# EAGLE board ArduinoMegaShield2 (EAGLE 8.3.2)
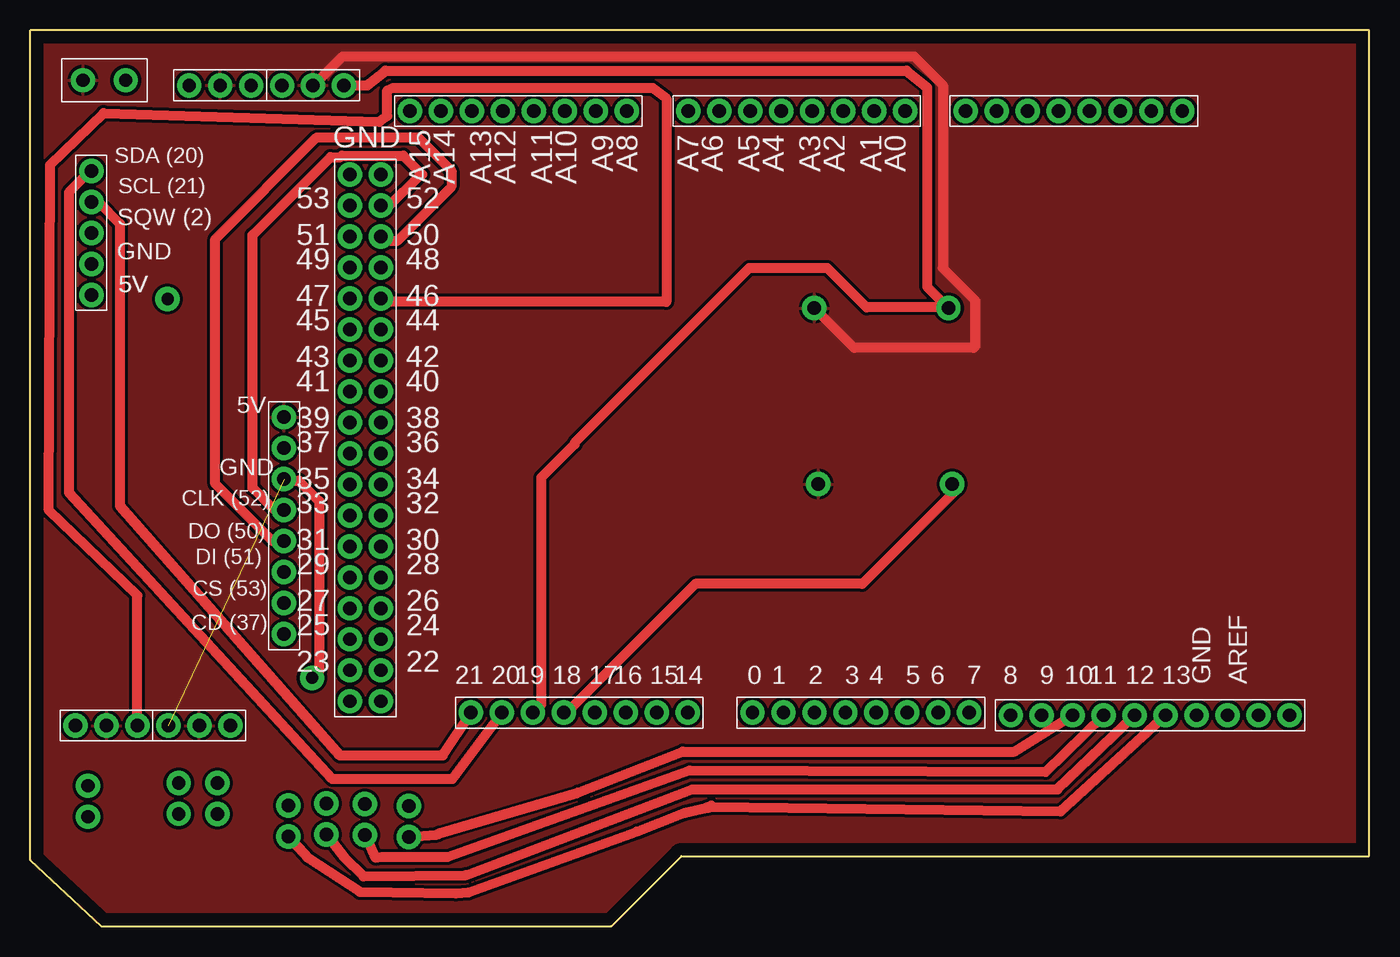
[diagram p0: board, top side]
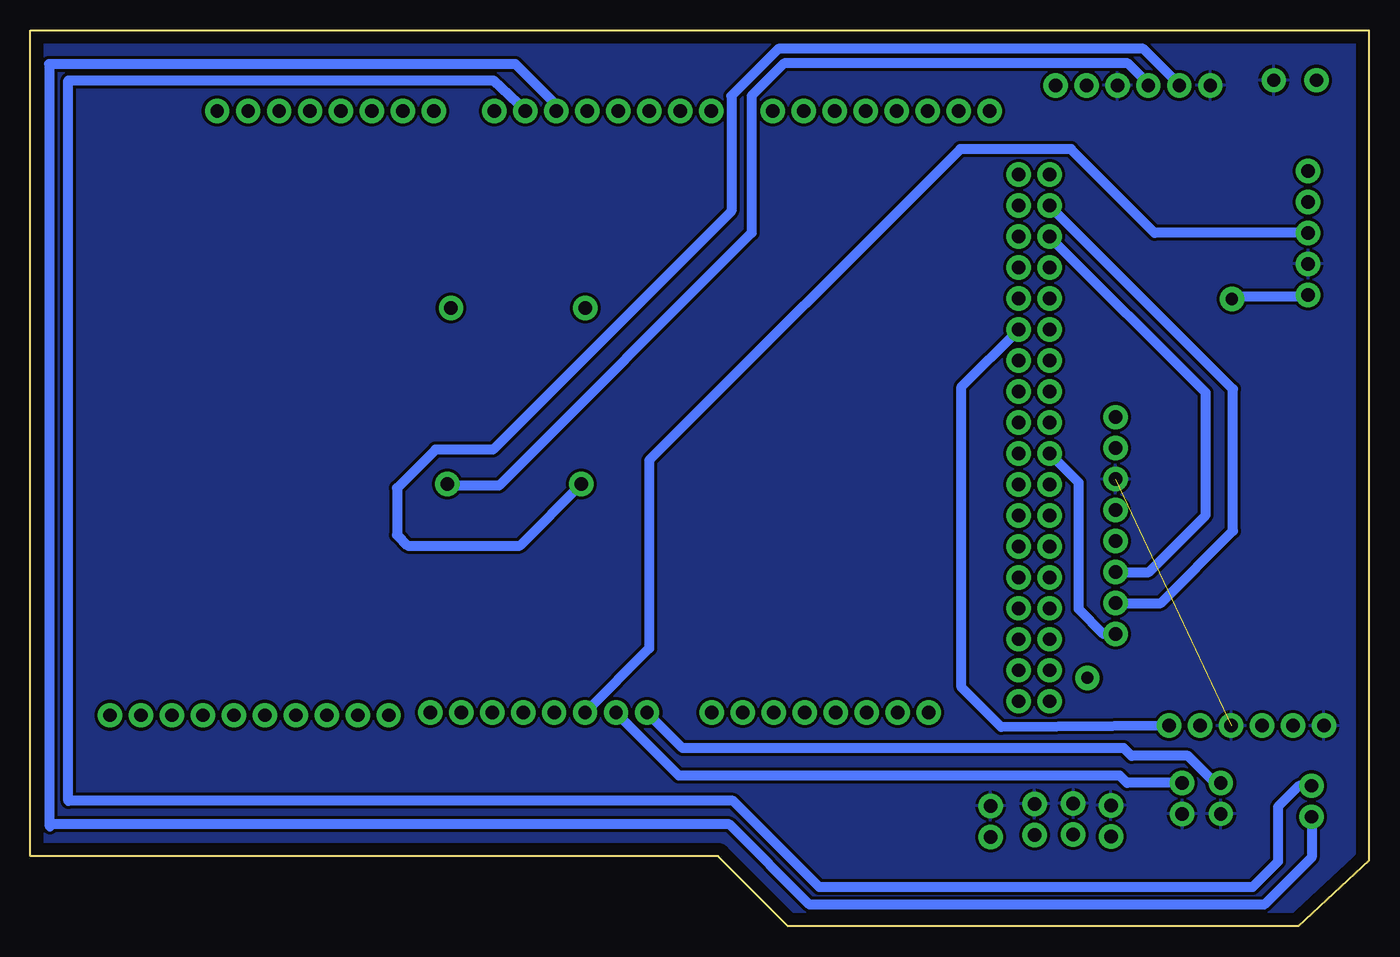
[diagram p1: board, bottom side, seen from below]

Size 109.8 x 73.45 mm. Coordinates in mm from the lower left corner, seen from the top.
Outline: 109.8,5.75 109.8,73.45 0,73.45 0,5.42 5.8,0 47.66,0 53.4,5.75 109.8,5.75
Copper layers (1*16): Top 0.035mm / dielectric 1.5mm / Bottom 0.035mm
Design rules "default": minimum track width 6mil, minimum drill 0.35mm, track to track 6mil, track to pad 6mil, pad to pad 6mil, via to via 6mil, smd to smd 6mil, copper to edge 40mil, drill to drill 6mil, minimum pad ring 10mil, minimum via ring 8mil, stop-mask expansion 4mil, vias tented up to drill 0mil, thermal gap 10mil

## Footprints (pad centres in the part's own frame; a part is rotated, then mirrored left to right if it is on the bottom)
8PINHEADER2.54MM = drill 1.1 pad 2: P$1 -8.89,0; P$2 -6.35,0; P$3 -3.81,0; P$4 -1.27,0; P$5 1.27,0; P$6 3.81,0; P$7 6.35,0; P$8 8.89,0
10PINHEADER2.54MM = drill 1.1 pad 2: P$1 1.27,0; P$2 3.81,0; P$3 6.35,0; P$4 8.89,0; P$5 11.43,0; P$6 -1.27,0; P$7 -3.81,0; P$8 -6.35,0; P$9 -8.89,0; P$10 -11.43,0
18X2HEADER2.54MM = drill 1.1 pad 2: P$1 -21.59,1.27; P$2 -19.05,1.27; P$3 -16.51,1.27; P$4 -13.97,1.27; P$5 -11.43,1.27; P$6 -8.89,1.27; P$7 -6.35,1.27; P$8 -3.81,1.27; P$9 -1.27,1.27; P$10 1.27,1.27; P$11 3.81,1.27; P$12 6.35,1.27; P$13 8.89,1.27; P$14 11.43,1.27; P$15 13.97,1.27; P$16 16.51,1.27; P$17 19.05,1.27; P$18 21.59,1.27; P$19 21.59,-1.27; P$20 19.05,-1.27; P$21 16.51,-1.27; P$22 13.97,-1.27; P$23 11.43,-1.27; P$24 8.89,-1.27; P$25 6.35,-1.27; P$26 3.81,-1.27; P$27 1.27,-1.27; P$28 -1.27,-1.27; P$29 -3.81,-1.27; P$30 -6.35,-1.27; P$31 -8.89,-1.27; P$32 -11.43,-1.27; P$33 -13.97,-1.27; P$34 -16.51,-1.27; P$35 -19.05,-1.27; P$36 -21.59,-1.27
5PINHEADER2.54MM = drill 1.1 pad 2: 5V 5.08,0; GND 2.54,0; P$1 -5.08,0; P$2 -2.54,0; P$3 0,0
SERVOS = drill 1.1 pad 2: 5V 2.54,0; GND 5.08,0; P$1 0,0
SDCARDMODULE = drill 1.1 pad 2: 5V 8.89,0; GND 3.81,0; P$1 -8.89,0; P$2 -6.35,0; P$3 -3.81,0; P$4 -1.27,0; P$5 1.27,0; P$7 6.35,0
HALLEFFECTSENSORS = drill 1.1 pad 2: GND 5.08,0; P$1 0,0; P$2 2.54,0
2PIN2.54MM = drill 1.1 pad 2: GND 2.54,0; P$1 0,0
2PIN11MM = drill 1.1 pad 2: 5V 11,0; P$1 0,0
BUTTONS = drill 1.1 pad 2: P$1 0,0; P$2 2.54,0
2PINTERMINAL3.5MM = drill 1.1 pad 2: 5V 0,0; GND 3.5,0

## Placement (x,y rotation side)
U$1  8PINHEADER2.54MM  [8PINHEADER2.54MM]  68.12,17.52 0 top
U$2  8PINHEADER2.54MM  [8PINHEADER2.54MM]  45.02,17.52 0 top
U$3  8PINHEADER2.54MM  [8PINHEADER2.54MM]  40.02,66.85 0 top
U$4  8PINHEADER2.54MM  [8PINHEADER2.54MM]  62.85,66.85 0 top
U$5  8PINHEADER2.54MM  [8PINHEADER2.54MM]  85.59,66.85 0 top
U$6  10PINHEADER2.54MM  [10PINHEADER2.54MM]  91.85,17.3 180 top
U$7  18X2HEADER2.54MM  [18X2HEADER2.54MM]  27.47,40.04 90 top
U$8  5PINHEADER2.54MM  [5PINHEADER2.54MM]  5,56.85 270 top
U$9  SERVOS  [SERVOS]  8.77,16.46 180 top
U$10  SDCARDMODULE  [SDCARDMODULE]  20.8,32.85 90 top
U$11  SERVOS  [SERVOS]  16.39,16.46 180 top
U$12  HALLEFFECTSENSORS  [HALLEFFECTSENSORS]  18.1,68.95 180 top
U$13  HALLEFFECTSENSORS  [HALLEFFECTSENSORS]  25.72,68.95 180 top
U$14  2PIN2.54MM  [2PIN2.54MM]  15.33,11.75 270 top
U$15  2PIN2.54MM  [2PIN2.54MM]  12.15,11.76 270 top
U$16  2PIN2.54MM  [2PIN2.54MM]  21.17,7.37 90 top
U$17  2PIN2.54MM  [2PIN2.54MM]  24.27,7.53 90 top
U$18  2PIN2.54MM  [2PIN2.54MM]  27.44,7.48 90 top
U$19  2PIN2.54MM  [2PIN2.54MM]  31.05,7.33 90 top
U$20  2PIN11MM  [2PIN11MM]  75.3,50.68 180 top
U$21  2PIN11MM  [2PIN11MM]  75.62,36.25 180 top
U$22  BUTTONS  [BUTTONS]  4.72,11.52 270 top
U$23  2PINTERMINAL3.5MM  [2PINTERMINAL3.5MM]  4.31,69.37 0 top

## Library data of the parts
U$1-U$23 = ArduinoMegaShield2

## Nets
5V: U$9.5V U$10.5V U$11.5V U$12.P$2 U$13.P$2 U$20.5V U$21.5V U$23.5V
GND: U$8.GND U$9.GND U$10.GND U$11.GND U$12.GND U$13.GND U$14.GND U$15.GND U$16.GND U$17.GND U$18.GND U$19.GND U$23.GND
N$1: U$13.P$1 U$20.P$1
N$4: U$4.P$7 U$22.P$1
N$5: U$4.P$6 U$22.P$2
N$6: U$2.P$2 U$8.P$1
N$7: U$2.P$1 U$8.P$2
N$8: U$1.P$3 U$8.P$3
N$9: U$12.P$1 U$21.P$1
N$12: U$7.P$20 U$10.P$5
N$13: U$7.P$21 U$10.P$4
N$14: U$7.P$16 U$10.P$3
N$15: U$7.P$17 U$10.P$2
N$16: U$7.P$9 U$10.P$1
N$17: U$7.P$23 U$9.P$1
N$18: U$7.P$24 U$11.P$1
N$19: U$1.P$2 U$14.P$1
N$20: U$1.P$1 U$15.P$1
N$21: U$6.P$6 U$16.P$1
N$22: U$6.P$1 U$17.P$1
N$23: U$6.P$2 U$18.P$1
N$24: U$6.P$3 U$19.P$1

## Tracks (layer width: path | path; a pad name or v marks a point on that pad's centre or on a via)
5V
  Top 0.813: U$13.P$2 23.24,68.95 25.61,71.32 72.48,71.32 74.84,68.96 74.84,53.97 77.48,51.32 77.48,47.53 77.37,47.42 67.57,47.42 U$20.5V | U$23.5V 4.31,69.71 4.51,69.91
  Bottom 0.813: U$12.P$2 15.56,68.98 18.53,71.95 48.46,71.95 52.31,68.1 52.31,58.64 71.87,39.08 76.58,39.08 79.73,35.93 79.73,32.1 78.85,31.21 69.66,31.21 U$21.5V
  pour Top (isolate 0.254): 0,73.45 0,5.42 5.8,0 47.66,0 53.4,5.75 109.8,5.75 109.8,73.45
GND  (1 unrouted)
  Top 0.813: U$23.GND 7.81,69.49
  Bottom 0.813: U$23.GND 8.42,69.37
  pour Bottom (isolate 0.254): 0,73.45 0,5.42 5.8,0 47.66,0 53.4,5.75 109.8,5.75 109.8,73.45
N$1
  Top 0.813: U$13.P$1 27.62,68.95 29.12,70.15 71.87,70.15 73.54,68.79 73.54,52.44 U$20.P$1
N$2  (via drill 1 pad 2)
  other vias: 11.25,51.44
N$3
  Bottom 0.813: 5.22,51.6 11.06,51.6 11.23,51.43
N$4
  Bottom 0.813: U$22.P$1 5.75,11.52 7.48,9.79 7.48,5.29 9.56,3.21 45.09,3.21 52.16,10.27 106.7,10.27 106.7,69.35 71.84,69.35 U$4.P$7
N$5
  Bottom 0.813: U$22.P$2 4.72,5.65 8.6,1.76 45.9,1.76 52.48,8.34 108.04,8.34 108.2,8.18 108.2,70.62 108.3,70.71 70.04,70.71 67.77,68.45 | 67.77,68.45 66.73,67.41 | U$4.P$6 66.66,67.34 67.77,68.45
N$6
  Top 0.813: U$8.P$1 4.9,61.93 3.16,60.18 3.16,35.58 24.75,12.09 34.62,12.09 U$2.P$2
N$7
  Top 0.813: U$8.P$2 5.54,59.39 7.32,57.62 7.32,34.46 25.37,14.01 33.82,14.01 U$2.P$1
N$8
  Bottom 0.813: U$8.P$3 17.59,56.85 24.45,63.71 33.52,63.71 59.04,38.2 59.04,22.79 U$1.P$3
N$9
  Bottom 0.813: U$12.P$1 18.1,69.06 19.79,70.75 47.99,70.75 50.64,68.1 50.64,56.86 71.38,36.13 75.5,36.13 U$21.P$1
N$12
  Top 0.813: U$10.P$5 20.04,34.12 18.21,35.95 18.21,56.67 24.61,63.07 25.44,63.07 25.55,63.19 30.58,63.19 32.14,61.63 31.99,61.63 29.26,58.9 28.93,58.9 U$7.P$20
N$13
  Top 0.813: U$10.P$4 19.86,31.58 15.17,36.27 15.17,56.35 23.49,64.68 31.81,64.68 34.54,61.95 34.54,60.65 30.06,56.17 29.12,56.17 U$7.P$21
N$14
  Bottom 0.813: U$10.P$3 18.07,29.04 13.41,33.7 13.41,43.75 U$7.P$16
N$15
  Bottom 0.813: U$10.P$2 17.08,26.5 11.16,32.42 11.16,44.05 U$7.P$17
N$16
  Bottom 0.813: U$10.P$1 21.77,23.96 23.81,26 23.81,36.38 U$7.P$9
N$17
  Top 0.813: U$9.P$1 8.77,27.13 1.5,34.1 1.62,62.44 6,66.67 28.62,65.95 29.26,66.44 29.26,68.53 29.74,68.75 51.03,68.75 52.16,67.89 52.16,51.2 29.02,51.2 U$7.P$23
N$18
  Bottom 0.813: U$11.P$1 30.17,16.32 33.42,19.58 33.42,44.25 U$7.P$24
N$19
  Bottom 0.813: U$14.P$1 19.85,11.75 20.45,12.36 56.6,12.36 U$1.P$2
N$20
  Bottom 0.813: U$15.P$1 12.64,11.76 14.85,13.96 19.49,13.96 20.13,14.6 56.31,14.6 U$1.P$1
N$21
  Top 0.813: U$16.P$1 22.84,5.57 27.03,2.81 34.88,2.69 35.93,2.78 49.72,7.75 53.65,9.3 55.46,9.73 | 55.46,9.73 55.68,9.78 | 55.83,9.9 55.82,9.9 | 55.83,9.9 55.73,9.78 84.51,9.41 U$6.P$6 | 55.46,9.73 55.66,9.73 55.83,9.9
N$22
  Top 0.813: U$17.P$1 25.7,5.7 27.32,4.08 35.73,4.2 54.3,11.21 84.25,11.21 U$6.P$1
N$23
  Top 0.813: U$18.P$1 28.27,5.62 28.81,5.69 34.21,5.69 54.06,12.78 83.28,12.66 U$6.P$2
N$24
  Top 0.813: U$19.P$1 33.32,7.52 33.52,7.61 44.89,10.95 53.5,14.31 80.71,14.31 U$6.P$3
N$25
  Top 0.813: 75.26,50.74 68.59,50.74 65.37,53.96 58.95,53.96 44.63,39.64 44.63,39.52 41.89,36.78 41.89,18.16 41.17,17.45
N$26
  Top 0.813: 75.74,36.3 75.74,35.58 68.23,28.07 54.53,28.07 43.91,17.45
N$27
  Top 0.813: 20.81,36.54 22,36.54 23.69,34.85 23.69,20.93 23.1,20.33
N$28  (via drill 1 pad 2)
  other vias: 23.1,20.37

## Text on the board
tPlace: GND | SDA (20) | A9 | A8 | A7 | A6 | A5 | A4 | A3 | A2 | A1 | A0 | A15 | A14 | A13 | A12 | A11 | A10 | SCL (21) | 53 | 52 | SQW (2) | 51 | 50 | GND | 49 | 48 | 5V | 5V | 47 | 46 | 45 | 44 | 43 | 42 | 41 | 40 | 5V | 39 | 38 | 37 | 36 | GND | 35 | 34 | CLK (52) | 33 | 32 | DO (50) | 31 | 30 | DI (51) | 29 | 28 | CS (53) | 27 | 26 | CD (37) | 25 | 24 | 23 | 22 | 21 | 20 | 19 | 18 | 17 | 16 | 15 | 14 | 0 | 1 | 2 | 3 | 4 | 5 | 6 | 7 | 8 | 9 | 10 | 11 | 12 | 13 | GND | AREF